# Altium PCB 00_Main_PCB_Rev1.PcbDoc
Units mm, origin at the board's own origin, x right, y up, seen from the top; angles counter-clockwise.
Board outline 99.19 x 63.88 mm, 2 copper layers (Top Layer, Bottom Layer); 5 components, 38 nets, 148 pads, 19 vias.
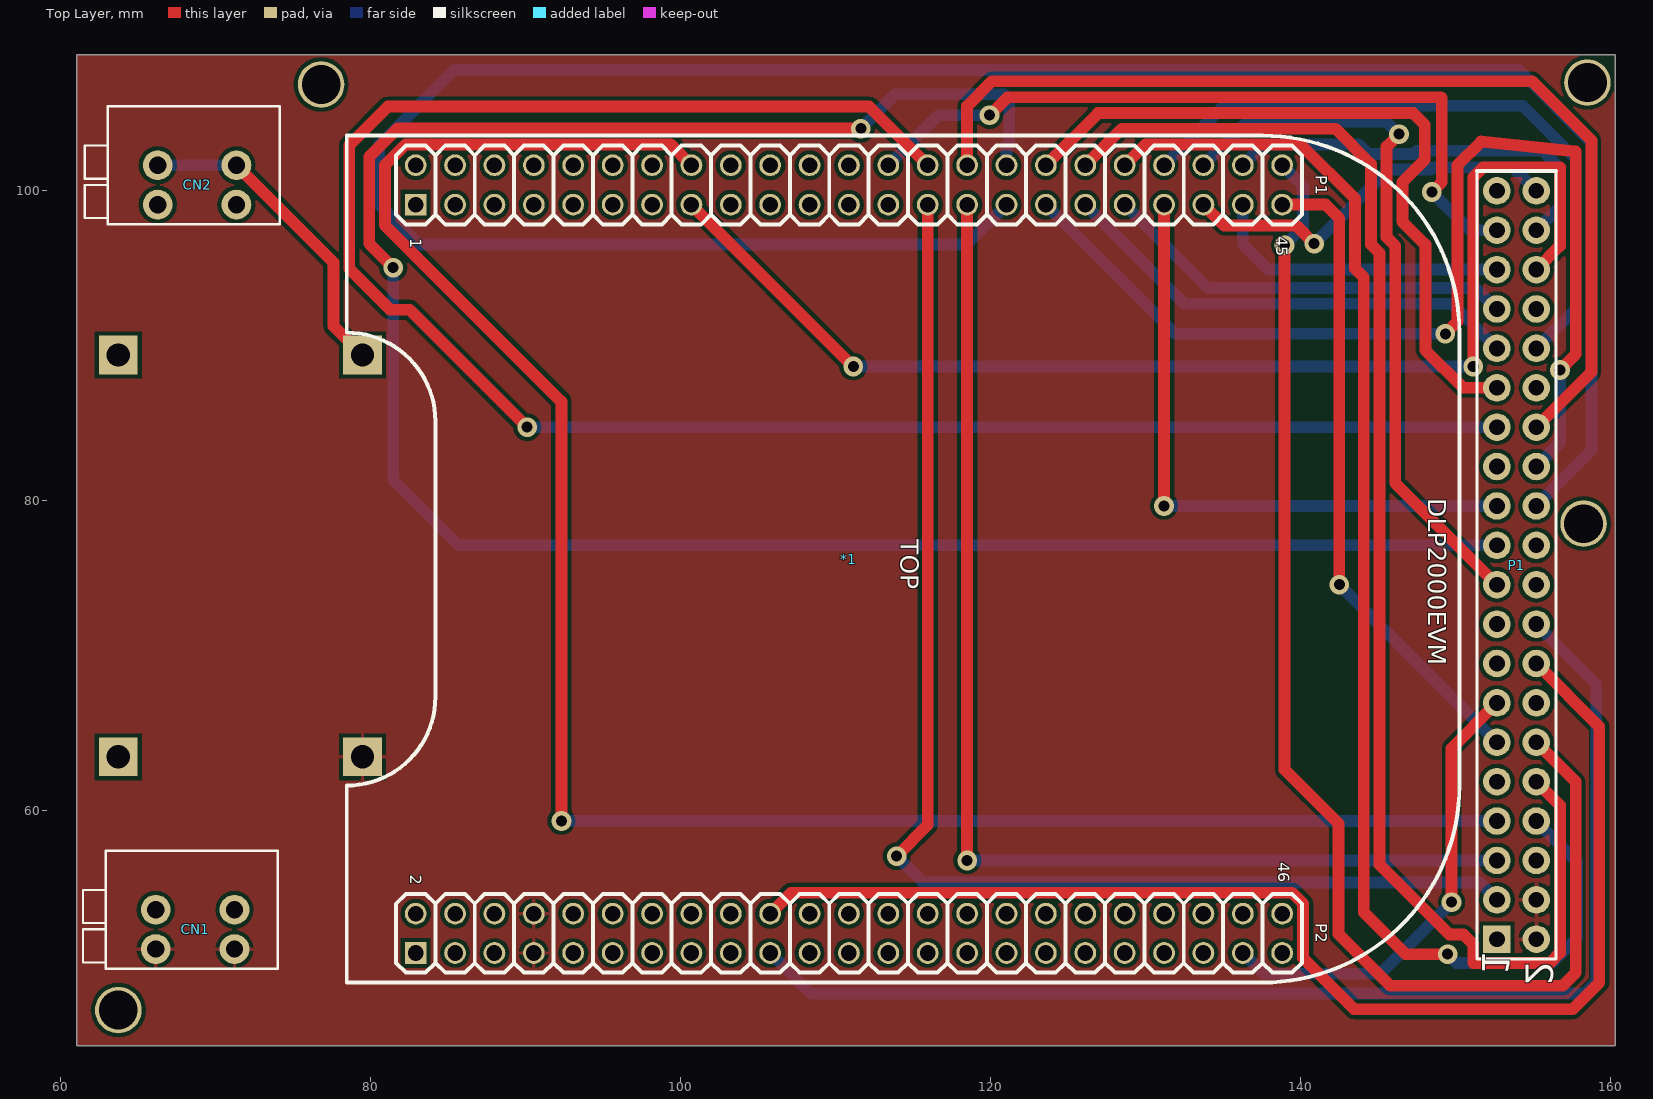
[diagram p0: Top Layer view]
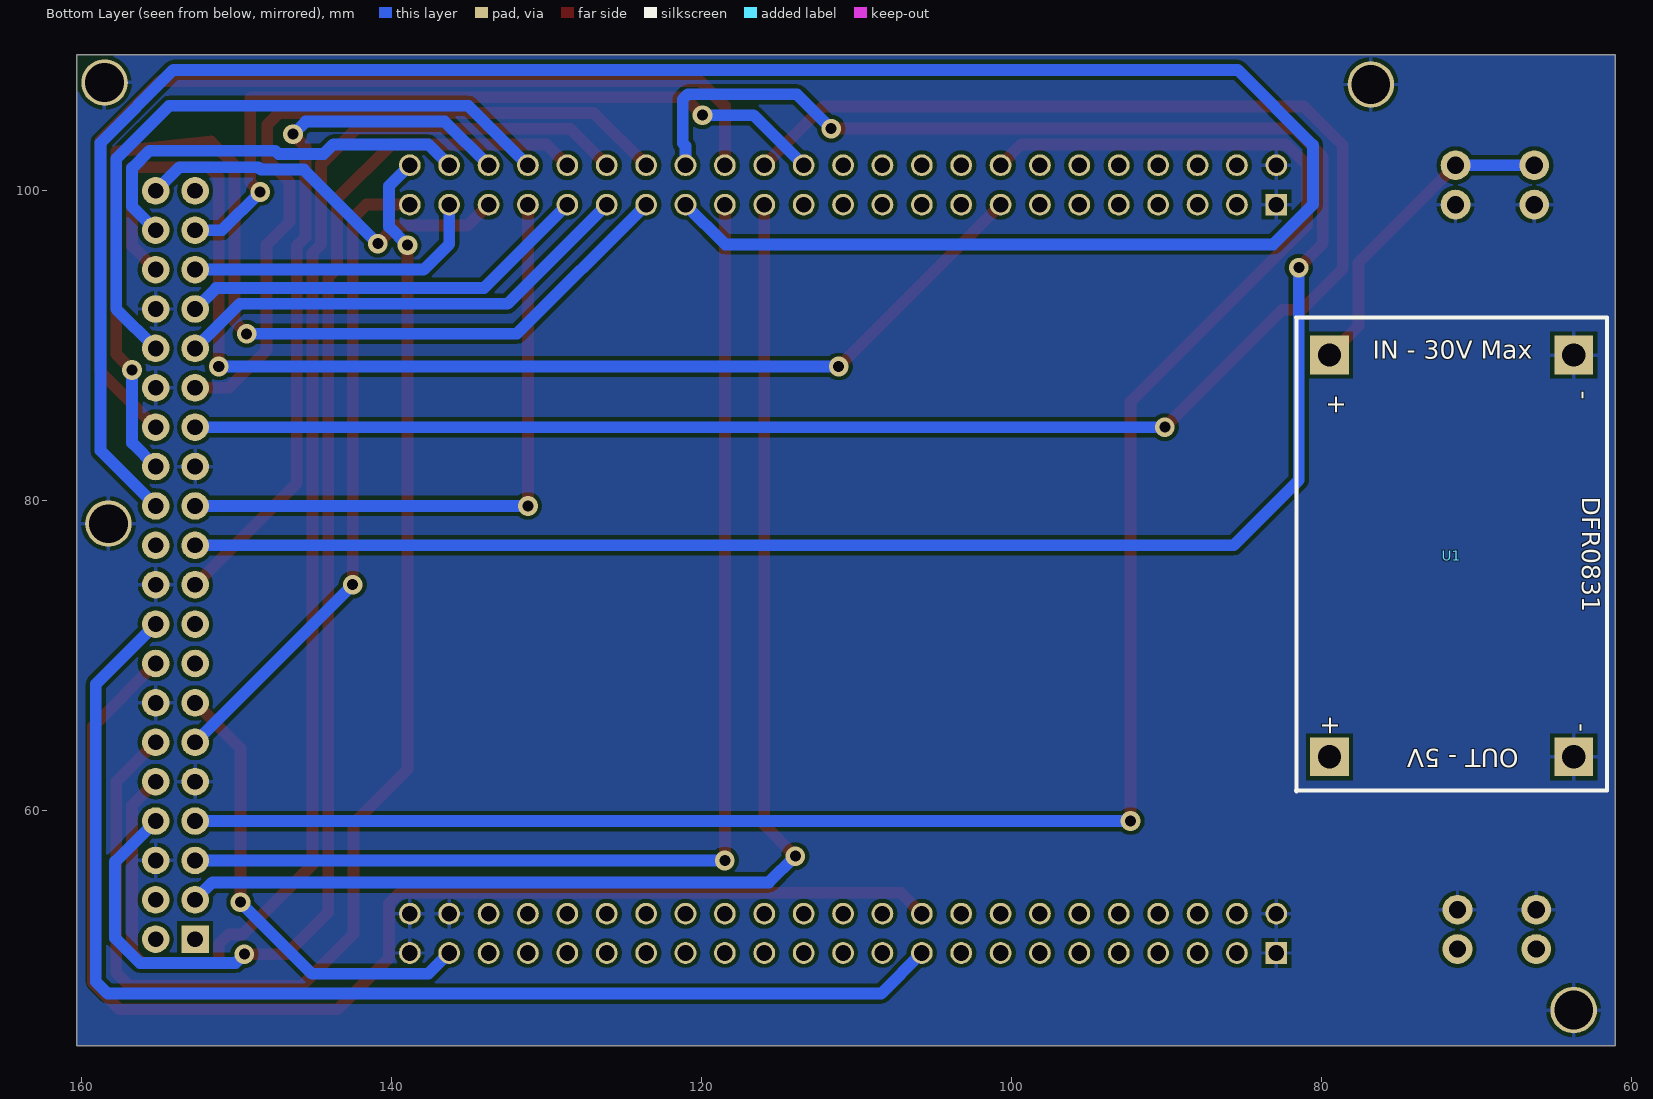
[diagram p1: Bottom Layer view, seen from below]

## Layer stack, top to bottom
Top Solder: solder mask 0.0102, Solder Resist, Dk 3.5
Top Layer: signal copper 0.0356
Dielectric 1: dielectric 0.32, FR-4, Dk 4.8
Bottom Layer: signal copper 0.0356
Bottom Solder: solder mask 0.0102, Solder Resist, Dk 3.5

## Board outline
61.087,44.831 61.087,95.885 61.087,108.712 160.274,108.712 160.274,44.831

## Design rules (kind name [scope] priority, off if disabled: settings)
Clearance [All] p1: gap=0.254 ignorepadtopadclearanceinfootprint=FALSE except(0: Arc-Hole Track-Hole SMDPad-Hole THPad-Hole Via-Hole Fill-Hole Poly-Hole Region-Hole Text-Hole)
PolygonConnect [All] p1: connectstyle=Relief reliefconductorwidth=0.254 reliefentries=4 polygonreliefangle="90 Angle" airgapwidth=0.254
RoutingVias [All] p1: holewidth=0.711 width=1.27 viastyle="Through Hole" minholewidth=0.711 minwidth=1.27 maxholewidth=0.711 maxwidth=1.27
SolderMaskExpansion [All] p1: expansion=0.102 istentingtop=FALSE
Width [All] p1: maxlimit=1.27 minlimit=0.508 preferedwidth=0.762 minimp=50.000000 maximp=50.000000 favimp=50.000000
30 further rules are at their usual default settings.

## Classes and differential pairs
net class VIDEO_CTRL[0..3]: VIDEO_CTRL0 VIDEO_CTRL1 VIDEO_CTRL2 VIDEO_CTRL3
net class "I2C [0..1]": "I2C 0" "I2C 1"
net class DATA_D[0..17]: DATA_D0 DATA_D1 DATA_D2 DATA_D3 DATA_D4 DATA_D5 DATA_D6 DATA_D7 DATA_D8 DATA_D9 DATA_D10 DATA_D11 DATA_D12 DATA_D13 DATA_D14 DATA_D15 DATA_D16 DATA_D17

## Components (designator, comment, footprint, x,y, rotation, side; value= is the part's Value field where it differs from the comment)
*1 "DLP2000EVM" DLP_2000EVM 114.427,75.819 r270 top
CN1 "DLP2000EVM Power" CONN-TH_2P-P2.54_JILN_JL141V-25402GA1 68.707,52.324 r90 top
CN2 "Input 12V Power" CONN-TH_2P-P2.54_JILN_JL141V-25402GA1 68.834,100.33 r90 top
P1 "HDR2X20-2 Header ONLY" "Raspberry Pi A+" 153.924,75.692 r90 top
U1 "DFR0831" DFR0831 81.661,91.77 r270 bottom

## Footprints (in the part's own frame and the unit in brackets; to place one, negate y for a bottom-side part, rotate by r counter-clockwise, add the part's x,y. Pads: shape width x height; smd on the part's side, far side on the other; paste and mask are expansions set on the pad)
CONN-TH_2P-P2.54_JILN_JL141V-25402GA1 [mm]
  round 1.92 hole 1.12: 1(-1.27,2.54) 1(-1.27,-2.54) 2(1.27,2.54) 2(1.27,-2.54)
  silkscreen extent -2.54,-5.34 5.08,7.23
DFR0831 [mm] "DC-DC Buck Converter 7-24V to 5V 4A"
  rect 2.5x2.5 hole 1.5: 1(2.413,17.907) 2(2.413,2.159) 3(28.321,2.159) 4(28.321,17.907)
  silkscreen extent 0,0 30.55,20.07, body extent 0.25,-0.33 30.73,19.94, height 7
DLP_2000EVM [mil] "DLP Projector"
  rect 55.1x55.1 hole 39.4: P1_1(-915,-1240) P2_1(985,-1240)
  round 55.1 hole 39.4: P1_2(-1015,-1240) P1_3(-915,-1140) P1_4(-1015,-1140) P1_5(-915,-1040) P1_6(-1015,-1040) P1_7(-915,-940) P1_8(-1015,-940) P1_9(-915,-840) P1_10(-1015,-840) P1_11(-915,-740) P1_12(-1015,-740) P1_13(-915,-640) P1_14(-1015,-640) P1_15(-915,-540) P1_16(-1015,-540) P1_17(-915,-440) P1_18(-1015,-440) P1_19(-915,-340) P1_20(-1015,-340) P1_21(-915,-240) P1_22(-1015,-240) P1_23(-915,-140) P1_24(-1015,-140) P1_25(-915,-40) P1_26(-1015,-40) P1_27(-915,60) P1_28(-1015,60) P1_29(-915,160) P1_30(-1015,160) P1_31(-915,260) P1_32(-1015,260) P1_33(-915,360) P1_34(-1015,360) P1_35(-915,460) P1_36(-1015,460) P1_37(-915,560) P1_38(-1015,560) P1_39(-915,660) P1_40(-1015,660) P1_41(-915,760) P1_42(-1015,760) P1_43(-915,860) P1_44(-1015,860) P1_45(-915,960) P1_46(-1015,960) P2_2(885,-1240) P2_3(985,-1140) P2_4(885,-1140) P2_5(985,-1040) P2_6(885,-1040) P2_7(985,-940) P2_8(885,-940) P2_9(985,-840) P2_10(885,-840) P2_11(985,-740) P2_12(885,-740) P2_13(985,-640) P2_14(885,-640) P2_15(985,-540) P2_16(885,-540) P2_17(985,-440) P2_18(885,-440) P2_19(985,-340) P2_20(885,-340) P2_21(985,-240) P2_22(885,-240) P2_23(985,-140) P2_24(885,-140) P2_25(985,-40) P2_26(885,-40) P2_27(985,60) P2_28(885,60) P2_29(985,160) P2_30(885,160) P2_31(985,260) P2_32(885,260) P2_33(985,360) P2_34(885,360) P2_35(985,460) P2_36(885,460) P2_37(985,560) P2_38(885,560) P2_39(985,660) P2_40(885,660) P2_41(985,760) P2_42(885,760) P2_43(985,860) P2_44(885,860) P2_45(985,960) P2_46(885,960)
  silkscreen extent -1090,-1415 1060,1410
"Raspberry Pi A+" [mil] "Raspberry Pi A+ Layout"
  rect 70x70 hole 40: 1(-945,50)
  round 70 hole 40: 2(-945,-50) 3(-845,50) 4(-845,-50) 5(-745,50) 6(-745,-50) 7(-645,50) 8(-645,-50) 9(-545,50) 10(-545,-50) 11(-445,50) 12(-445,-50) 13(-345,50) 14(-345,-50) 15(-245,50) 16(-245,-50) 17(-145,50) 18(-145,-50) 19(-45,50) 20(-45,-50) 21(55,50) 22(55,-50) 23(155,50) 24(155,-50) 25(255,50) 26(255,-50) 27(355,50) 28(355,-50) 29(455,50) 30(455,-50) 31(555,50) 32(555,-50) 33(655,50) 34(655,-50) 35(755,50) 36(755,-50) 37(855,50) 38(855,-50) 39(955,50) 40(955,-50)
  silkscreen extent -995,-100 1005,100

## Part data
CN1 CN2: library part JL141V-25402GA1, BOM_JLCPCB Part Class="Extended Part", BOM_Manufacturer=JILN(锦凌), BOM_Manufacturer Part=JL141V-25402GA1, BOM_Supplier=LCSC, BOM_Supplier Part=C2922619, Contributor=LCSC, spicePre=C, spiceSymbolName=JL141V-25402GA1
P1: library part "Raspberry Pi A+", "Header Only", sourceId=ajhDnJ4OM, spicePre=P, spiceSymbolName=HDR2X20-2, timeStamp=1467473853
U1: "DC-DC Buck Converter 7-24V to 5V 4A"

## Free pads (board coordinates)
  round 3 hole 2.5: 5(63.754,47.117) 5(76.835,106.807) 5(158.242,78.486) 5(158.496,106.934)

## Via types
v1: diameter 1.27, hole 0.711, Top Layer to Bottom Layer, 19 vias

## Nets (pads, with @x,y where several pads share a name; then routed paths per layer and width w, separated by ;. In a path a pad name is that pad's centre, name@x,y a point inside that pad or via, vN(x,y) a via of type N, cw(c..) or ccw(c..) an arc to the next point about the centre after c; other vN are vias at no path point)
+5V: *1.P2_7 *1.P2_8 CN1.1 P1.2 P1.4 U1.3
+12V: CN2.2 U1.2 | length 20.7
  Top Layer w0.762: CN2.2@71.374,101.6 77.625,95.349 77.625,91.234 U1.2
  Bottom Layer w0.762: CN2.2@66.294,101.6 CN2.2@71.374,101.6
DATA_D0: *1.P1_45 P1.11 | length 42
  Top Layer w0.762: *1.P1_45 141.605,99.06 142.494,98.171 v1(142.494,74.549)
  Bottom Layer w0.762: v1(142.494,74.549) P1.11
DATA_D1: *1.P1_46 P1.12 | length 85
  Top Layer w0.762: v1(138.963,96.444) 138.963,62.611 142.443,59.131 142.443,52.013 145.765,48.692 156.902,48.692 157.734,49.524 157.734,61.849 P1.12
  Bottom Layer w0.762: *1.P1_46 140.146,100.265 140.146,97.626 v1(138.963,96.444)
DATA_D2: *1.P1_43 P1.35 | length 19.6
  Bottom Layer w0.762: *1.P1_43 136.271,96.52 137.922,94.869 P1.35
DATA_D3: *1.P1_44 P1.38 | length 26.4
  Bottom Layer w0.762: *1.P1_44 137.617,102.946 143.739,102.946 144.354,102.331 147.295,102.331 147.493,102.529 155.606,102.529 156.718,101.417 156.718,98.933 P1.38
DATA_D4: *1.P1_41 P1.40 | length 25.2
  Top Layer w0.762: *1.P1_41 135.077,97.714 139.7,97.714 v1(140.868,96.545)
  Bottom Layer w0.762: v1(140.868,96.545) 145.638,101.315 148.407,101.315 148.565,101.473 153.67,101.473 P1.40
DATA_D5: *1.P1_42 P1.19 | length 46.5
  Top Layer w0.762: v1(146.347,103.607) 145.542,102.801 145.542,96.952 146.101,96.393 146.101,81.102 P1.19
  Bottom Layer w0.762: *1.P1_42 136.55,104.419 145.534,104.419 v1(146.347,103.607)
DATA_D6: *1.P1_39 P1.23 | length 40.9
  Top Layer w0.762: v1(131.191,79.629) *1.P1_39
  Bottom Layer w0.762: v1(131.191,79.629) P1.23
DATA_D7: *1.P1_40 P1.32 | length 42.8
  Bottom Layer w0.762: *1.P1_40 135.026,105.435 154.33,105.435 157.734,102.032 157.734,92.329 P1.32
DATA_D8: *1.P1_37 P1.33 | length 26.8
  Bottom Layer w0.762: *1.P1_37 134.029,93.682 151.301,93.682 P1.33
DATA_D9: *1.P1_38 P1.8 | length 87.5
  Top Layer w0.762: *1.P1_38 129.986,102.935 140.016,102.935 143.51,99.441 143.51,94.92 144.069,94.361 144.069,53.416 146.761,50.724 v1(149.479,50.724)
  Bottom Layer w0.762: v1(149.479,50.724) 150.038,50.165 156.21,50.165 157.81,51.765 157.81,56.693 P1.8
DATA_D10: *1.P1_36 P1.10 | length 92.6
  Top Layer w0.762: *1.P1_36 128.462,103.951 142.251,103.951 144.526,101.676 144.526,96.495 145.085,95.936 145.085,56.49 149.581,51.994 150.495,51.994 151.13,51.359 151.13,50.165 156.083,50.165 156.718,50.8 156.718,60.325 P1.10
DATA_D11: *1.P1_34 P1.29 | length 47.5
  Top Layer w0.762: *1.P1_34 126.938,104.967 147.255,104.967 148.005,104.217 148.005,101.955 146.558,100.508 146.558,97.968 148.046,96.48 148.046,89.681 150.478,87.249 P1.29
DATA_D12: *1.P1_35 P1.31 | length 30.4
  Bottom Layer w0.762: *1.P1_35 132.505,92.666 149.777,92.666 P1.31
DATA_D13: *1.P1_33 P1.26 | length 70.1
  Top Layer w0.762: v1(149.327,90.729) 150.114,91.516 150.114,101.6 151.638,103.124 157.734,102.489 157.734,89.408 v1(156.718,88.392)
  Bottom Layer w0.762: *1.P1_33 131.902,90.729 v1(149.327,90.729) ; P1.26 156.718,83.693 v1(156.718,88.392)
DATA_D14: *1.P1_31 P1.24 | length 153.5
  Bottom Layer w0.762: *1.P1_31 118.466,96.495 83.134,96.495 80.569,99.06 80.569,102.895 85.42,107.747 154.051,107.747 158.75,103.048 158.75,83.185 P1.24
DATA_D15: *1.P1_32 P1.21 | length 141.8
  Top Layer w0.762: v1(81.483,94.996) 79.934,96.545 79.934,102.144 81.752,103.962 v1(111.633,103.962)
  Bottom Layer w0.762: v1(81.483,94.996) 81.483,81.28 85.674,77.089 P1.21 ; v1(111.633,103.962) 113.843,106.172 120.879,106.172 121.209,105.842 121.209,103.022 121.031,102.845 *1.P1_32
DATA_D16: *1.P1_15 P1.36 | length 80
  Top Layer w0.762: *1.P1_15 v1(111.15,88.621) ; v1(151.13,88.621) 151.13,100.838 151.765,101.473 156.718,101.473 156.718,96.393 P1.36
  Bottom Layer w0.762: v1(111.15,88.621) v1(151.13,88.621)
DATA_D17: *1.P1_16 P1.7 | length 128.2
  Top Layer w0.762: v1(92.329,59.309) 92.329,86.36 80.95,97.739 80.95,101.6 82.296,102.946 99.365,102.946 *1.P1_16
  Bottom Layer w0.762: v1(92.329,59.309) P1.7
DATA_D18: *1.P1_11
DATA_D19: *1.P1_12
DATA_D20: *1.P1_17
DATA_D21: *1.P1_14
DATA_D22: *1.P1_13
DATA_D23: *1.P1_19
EXT_I2C_INT: P1.22
EXT_SCL: *1.P2_19 P1.18 | length 79.3
  Bottom Layer w0.762: *1.P2_19 108.407,48.184 158.293,48.184 159.058,48.949 159.058,68.145 P1.18
EXT_SDA: *1.P2_20 P1.16 | length 82.2
  Top Layer w0.762: *1.P2_20 107.137,54.686 139.446,54.686 140.157,53.975 140.157,50.459 143.448,47.168 157.531,47.168 159.258,48.895 159.258,65.405 P1.16
GND: *1.P1_1 *1.P1_2 *1.P2_1 *1.P2_2 *1.P2_44 *1.P2_45 *1.P2_46 CN1.2 CN2.1 P1.6 P1.9 P1.14 P1.20 P1.25 P1.30 P1.34 pad.5 U1.1 U1.4
GPIO5: *1.P1_18
GPIO_INIT_DONE: *1.P1_26 P1.37 | length 49.1
  Top Layer w0.762: v1(119.939,104.826) 121.096,105.983 149.059,105.983 149.098,105.943 149.098,100.508 v1(148.463,99.873)
  Bottom Layer w0.762: *1.P1_26 116.637,104.826 v1(119.939,104.826) ; v1(148.463,99.873) 150.927,97.409 P1.37
HOST_PRESENTZ: *1.P2_43 P1.13 | length 30
  Top Layer w0.762: v1(149.733,54.077) 149.733,64.008 P1.13
  Bottom Layer w0.762: *1.P2_43 137.606,49.465 145.122,49.465 v1(149.733,54.077)
PROJ_ON_EXT: *1.P2_15
VIDEO_CTRL_DATAEN: *1.P1_30 P1.28 | length 66.3
  Top Layer w0.762: *1.P1_30 118.491,105.41 120.091,107.01 154.94,107.01 158.75,103.2 158.75,88.265 P1.28
VIDEO_CTRL_HSYNC: *1.P1_29 P1.5 | length 76.5
  Top Layer w0.762: v1(118.491,56.769) *1.P1_29
  Bottom Layer w0.762: v1(118.491,56.769) P1.5
VIDEO_CTRL_PCLK: *1.P1_28 P1.27 | length 126.1
  Top Layer w0.762: v1(90.119,84.709) 82.544,92.284 81.28,92.284 78.641,94.922 78.641,102.898 81.128,105.385 112.166,105.385 *1.P1_28
  Bottom Layer w0.762: v1(90.119,84.709) P1.27
VIDEO_CTRL_VSYNC: *1.P1_27 P1.3 | length 82.7
  Top Layer w0.762: v1(113.944,57.048) 115.951,59.055 *1.P1_27
  Bottom Layer w0.762: v1(113.944,57.048) 115.646,55.347 151.536,55.347 P1.3
pads on no net: *1.P1_3 *1.P1_4 *1.P1_5 *1.P1_6 *1.P1_7 *1.P1_8 *1.P1_9 *1.P1_10 *1.P1_20 *1.P1_21 *1.P1_22 *1.P1_23 *1.P1_24 *1.P1_25 *1.P2_3 *1.P2_4 *1.P2_5 *1.P2_6 *1.P2_9 *1.P2_10 *1.P2_11 *1.P2_12 *1.P2_13 *1.P2_14 *1.P2_16 *1.P2_17 *1.P2_18 *1.P2_21 *1.P2_22 *1.P2_23 *1.P2_24 *1.P2_25 *1.P2_26 *1.P2_27 *1.P2_28 *1.P2_29 *1.P2_30 *1.P2_31 *1.P2_32 *1.P2_33 *1.P2_34 *1.P2_35 *1.P2_36 *1.P2_37 *1.P2_38 *1.P2_39 *1.P2_40 *1.P2_41 *1.P2_42 P1.1 P1.15 P1.17 P1.39

## Polygon pours and split planes (outlines as drawn)
no net on Mechanical 1 "NONET_L-01_P-001" (solid): 61.087,108.712
+5V on Top Layer "+5V_L01_P000" (solid, remove dead copper, pour order 0): 61.087,108.712 61.087,44.831 160.274,44.831 160.274,108.712
GND on Bottom Layer "GND_L02_P001" (solid, remove dead copper, pour order 1): 61.087,44.831 61.087,108.712 160.274,108.712 160.274,44.831

## Silkscreen, mask and mechanical layers (free items; w line width, h text height)
Mechanical 1:
  the board outline again, w0.254

## Text inside footprints (layer, text, board x,y; h text height)
*1: Top Overlay "2" at 82.575,55.855 h0.76 r270; Top Overlay "46" at 138.557,56.642 h0.76 r270; Top Overlay "45" at 138.43,97.028 h0.76 r270; Top Overlay "P2" at 140.97,52.705 h0.76 r270; Top Overlay "P1" at 140.97,100.965 h0.76 r270; Top Overlay "1" at 82.575,96.876 h0.76 r270; Top Overlay "TOP" at 113.814,77.47 h2 r270
P1: Top Overlay "2" at 154.508,48.717 h1.78 r270; Top Overlay "1" at 151.714,49.352 h1.78 r270
U1: Bottom Overlay "-" at 64.139,65.608 h2 r90; Bottom Overlay "-" at 64.012,87.071 h2 r90; Bottom Overlay "IN - 30V Max" at 76.708,88.745 h2; Bottom Overlay "OUT - 5V" at 67.31,64.316 h2 r180; Bottom Overlay "+" at 79.963,86.817 h2 r90; Bottom Overlay "+" at 80.344,66.116 h2 r90